# Altium PCB classyTKL_MXHS.PcbDoc (part 2 of 2)
Units mm, origin at the board's own origin, x right, y up, seen from the top; angles counter-clockwise.
Board outline 346.59 x 122.85 mm, 2 copper layers (Component Side, Bottom Layer), stack 1.571 mm thick; 194 components, 125 nets, 948 pads, 130 vias.
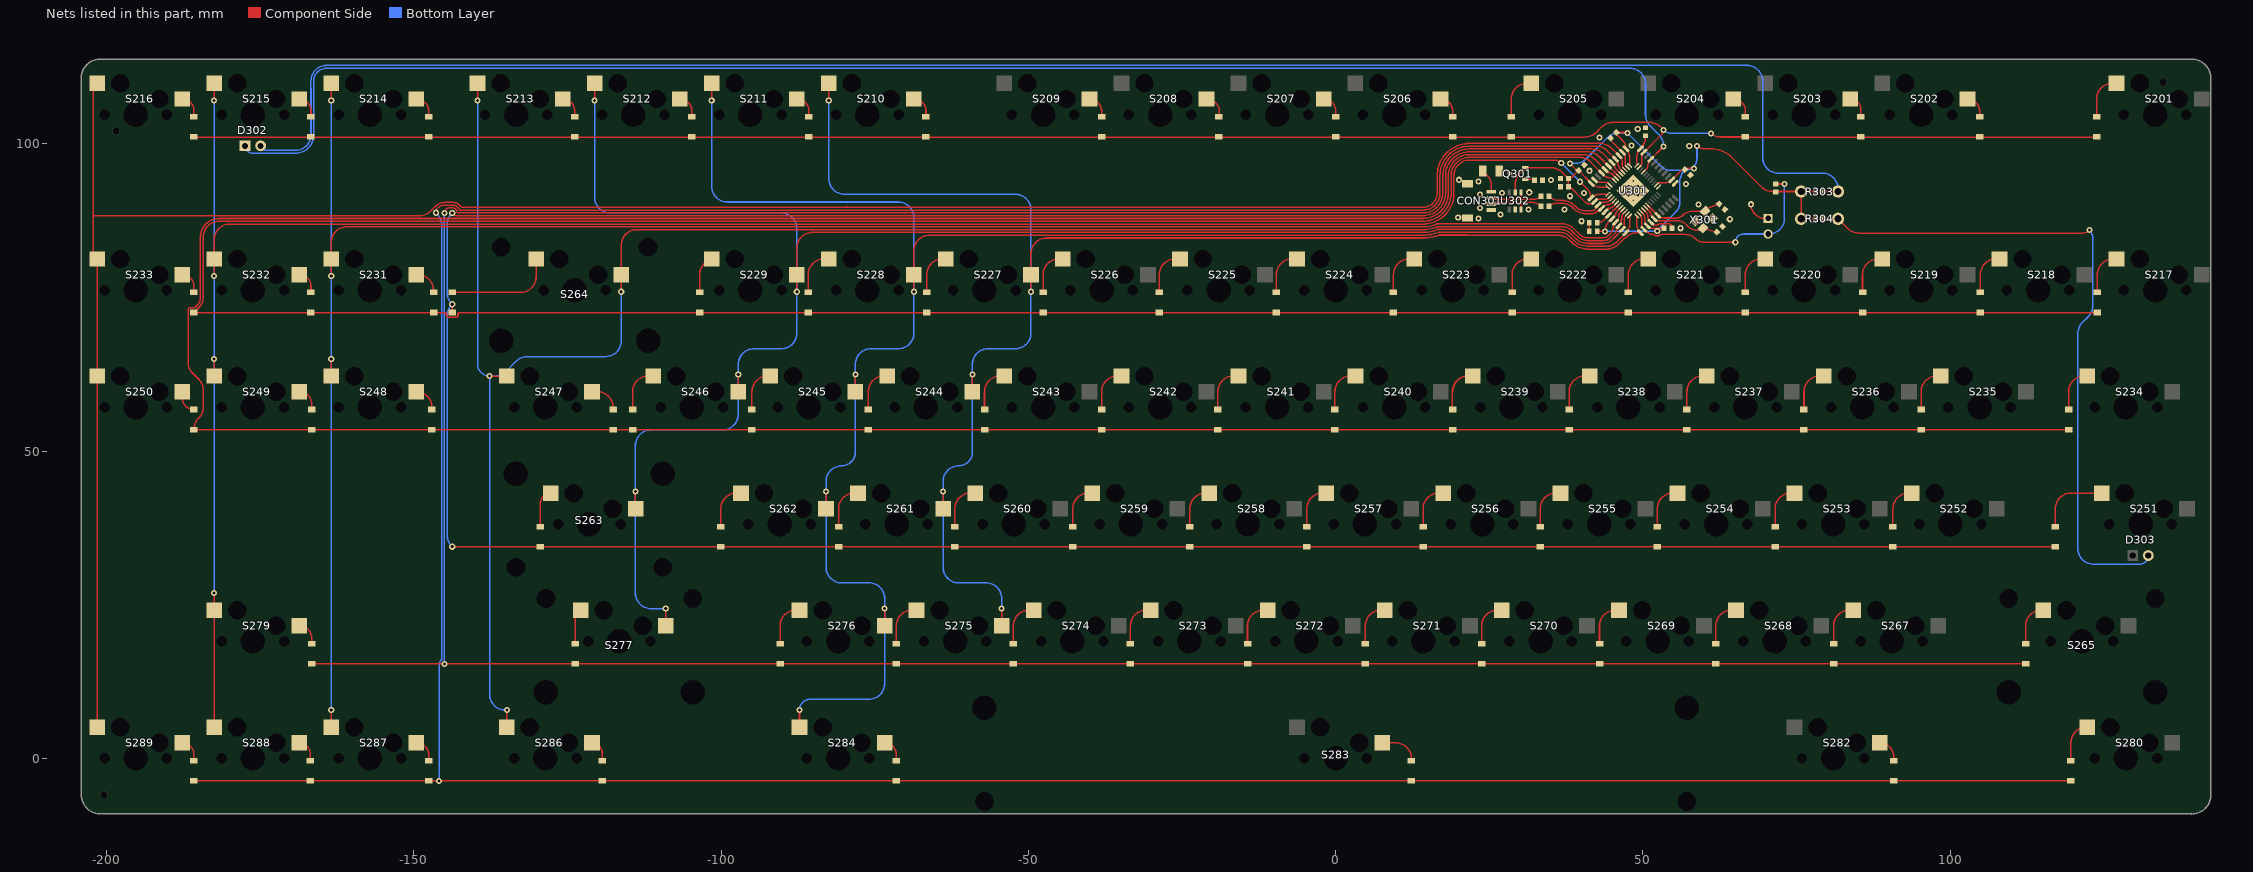
[diagram p2: the nets of this part, all layers, seen from the top]

## Via types
v1: diameter 1, hole 0.5, Component Side to Bottom Layer, tented both sides, 121 vias
v2: diameter 0.6, hole 0.3, Component Side to Bottom Layer, tented bottom, 9 vias

## Nets (pads, with @x,y where several pads share a name; then routed paths per layer and width w, separated by ;. In a path a pad name is that pad's centre, name@x,y a point inside that pad or via, vN(x,y) a via of type N, cw(c..) or ccw(c..) an arc to the next point about the centre after c; other vN are vias at no path point) (continued)
col11: S210.2 S227.2 S244.2 S261.2 S275.2 U301.12 | length 253.3
  Component Side w0.254: v1(-82.49,107.061) S210.2@-82.491,109.855 ; S261.2@-63.878,40.64 v1(-63.878,43.434) ; S244.2@-59.116,59.69 v1(-59.116,62.484) ; S275.2@-54.353,21.59 v1(-54.353,24.384) ; v1(-49.59,75.946) S227.2@-49.591,78.74 -49.591,82.153 cw(c-47.051,82.153) -47.051,84.693 14.198,84.693 ccw(c14.198,92.004) 16.777,85.163 cw(c16.866,84.925) 16.867,85.179 21.325,85.179 cw(c21.326,84.925) 21.333,85.179 ccw(c21.386,87.045) 21.386,85.178 36.032,85.178 cw(c36.034,84.47) 36.036,85.178 cw(c36.034,84.47) 36.056,85.178 cw(c35.972,82.185) 37.941,84.44 cw(c37.641,84.099) 37.962,84.421 ; 37.963,84.419 38.013,84.369 38.014,84.368 ; 38.015,84.367 38.395,83.987 ccw(c39.358,84.951) 38.486,83.904 cw(c38.323,83.709) 38.493,83.898 ccw(c41.127,86.847) 40.45,82.951 ccw(c41.127,86.847) 41.127,82.893 44.159,82.893 ccw(c44.159,85.433) 45.955,83.637 46.374,84.055 46.619,84.301 46.939,84.621 cw(c47.119,84.441) 47.06,84.689 ccw(c46.926,85.25) 47.172,84.728 ccw(c46.926,85.25) 47.333,84.841 47.464,84.972 47.595,85.103 cw(c47.775,84.924) 47.636,85.137 cw(c49.026,83.01) 49.026,85.55 U301.12@49.595,85.55 cw(c51.046,87.001) 48.994,87.001 U301.12@48.994,88.273
  Bottom Layer w0.254: v1(-82.49,107.061) -82.49,94.361 ccw(c-79.95,94.361) -79.95,91.821 -52.13,91.821 cw(c-52.13,89.281) -49.59,89.281 v1(-49.59,75.946) -49.59,69.215 cw(c-52.13,69.215) -52.13,66.675 -56.576,66.675 ccw(c-56.576,64.135) -59.116,64.135 v1(-59.116,62.484) -59.116,49.847 cw(c-61.338,49.847) -61.338,47.625 ccw(c-61.338,45.085) -63.878,45.085 v1(-63.878,43.434) -63.878,31.115 ccw(c-61.338,31.115) -61.338,28.575 -56.893,28.575 cw(c-56.893,26.035) -54.353,26.035 v1(-54.353,24.384)
col12: S211.2 S228.2 S245.2 S262.2 S276.2 S284.2 U301.11 | length 301.7
  Component Side w0.254: v1(-101.54,107.061) S211.2@-101.541,109.855 ; S284.2@-87.253,5.08 v1(-87.253,7.874) ; S262.2@-82.928,40.64 v1(-82.928,43.434) ; S245.2@-78.166,59.69 v1(-78.166,62.484) ; S276.2@-73.403,21.59 v1(-73.403,24.384) ; v1(-68.64,75.946) S228.2@-68.641,78.74 -68.641,82.607 cw(c-66.101,82.607) -66.101,85.147 14.198,85.147 ccw(c14.198,92.004) 16.69,85.616 cw(c16.782,85.379) 16.783,85.633 33.552,85.633 cw(c33.554,85.379) 33.562,85.633 ccw(c33.603,86.816) 33.603,85.632 36.34,85.632 cw(c36.34,83.092) 38.136,84.888 38.335,84.69 38.716,84.309 ccw(c39.358,84.951) 38.785,84.246 ccw(c41.127,86.847) 41.127,83.347 43.971,83.347 ccw(c43.971,85.887) 45.767,84.091 U301.11@47.226,85.55 47.417,85.741 ccw(c46.426,86.732) 47.827,86.732 U301.11@47.827,88.273
  Bottom Layer w0.254: v1(-101.54,107.061) -101.54,93.091 ccw(c-99,93.091) -99,90.551 -71.18,90.551 cw(c-71.18,88.011) -68.64,88.011 v1(-68.64,75.946) -68.64,69.215 cw(c-71.18,69.215) -71.18,66.675 -75.626,66.675 ccw(c-75.626,64.135) -78.166,64.135 v1(-78.166,62.484) -78.166,49.847 cw(c-80.388,49.847) -80.388,47.625 ccw(c-80.388,45.085) -82.928,45.085 v1(-82.928,43.434) -82.928,31.115 ccw(c-80.388,31.115) -80.388,28.575 -75.943,28.575 cw(c-75.943,26.035) -73.403,26.035 v1(-73.403,24.384) -73.403,12.192 cw(c-75.943,12.192) -75.943,9.652 -85.475,9.652 ccw(c-85.475,7.874) v1(-87.253,7.874)
col13: S212.2 S229.2 S246.2 S263.2 S277.2 U301.10 | length 297.6
  Component Side w0.254: v1(-120.59,107.061) S212.2@-120.591,109.855 ; S263.2@-113.951,40.64 v1(-113.951,43.434) ; S277.2@-109.021,21.59 v1(-109.021,24.384) ; S246.2@-97.216,59.69 v1(-97.216,62.484) ; v1(-87.69,75.946) S229.2@-87.691,78.74 -87.691,83.061 cw(c-85.151,83.061) -85.151,85.601 14.198,85.601 ccw(c14.198,92.004) 16.6,86.068 cw(c16.695,85.833) 16.697,86.087 36.528,86.087 cw(c36.528,83.547) 38.281,85.386 cw(c38.105,85.202) 38.284,85.383 cw(c38.105,85.202) 38.285,85.381 39.037,84.63 ccw(c39.358,84.951) 39.074,84.597 cw(c38.915,84.398) 39.085,84.587 ccw(c41.127,86.847) 41.127,83.801 43.378,83.801 ccw(c43.378,86.254) 45.112,84.518 ccw(c43.378,86.254) 45.113,84.52 45.257,84.664 46.661,86.067 ccw(c45.908,86.82) 46.827,86.282 ccw(c45.908,86.82) 46.972,86.82 46.972,87.686 cw(c48.032,87.686) 47.283,88.435 U301.10@47.474,88.626
  Bottom Layer w0.254: v1(-120.59,107.061) -120.59,91.313 ccw(c-118.05,91.313) -118.05,88.773 -90.23,88.773 cw(c-90.23,86.233) -87.69,86.233 v1(-87.69,75.946) -87.69,69.215 cw(c-90.23,69.215) -90.23,66.675 -94.676,66.675 ccw(c-94.676,64.135) -97.216,64.135 v1(-97.216,62.484) -97.216,56.007 cw(c-99.756,56.007) -99.756,53.467 -111.411,53.467 ccw(c-111.411,50.927) -113.951,50.927 v1(-113.951,43.434) -113.951,26.924 ccw(c-111.411,26.924) -111.411,24.384 v1(-109.021,24.384)
col14: S213.2 S247.2 S264.2 S286.2 U301.9 | length 318.3
  Component Side w0.254: v1(-139.64,107.061) S213.2@-139.641,109.855 ; v1(-137.672,62.23) S247.2@-134.878,62.23 ; S286.2@-134.878,5.08 v1(-134.878,7.874) ; v1(-116.265,75.946) S264.2@-116.266,78.74 -116.266,83.515 cw(c-113.726,83.515) -113.726,86.055 14.198,86.055 ccw(c14.198,92.004) 16.507,86.521 cw(c16.605,86.287) 16.607,86.541 36.715,86.541 cw(c36.715,84.001) 38.511,85.797 39.358,84.951 cw(c39.207,84.746) 39.379,84.934 ccw(c41.127,86.847) 41.127,84.255 43.378,84.255 ccw(c43.378,86.254) 44.792,84.841 45.449,85.497 ccw(c44.53,86.416) 45.829,86.416 U301.9@46.095,86.682 ccw(c45.101,87.675) 46.506,87.675 46.506,87.94 cw(c47.535,87.94) 46.808,88.667 U301.9@47.12,88.98
  Bottom Layer w0.254: v1(-139.64,107.061) -139.64,64.198 ccw(c-137.672,64.198) v1(-137.672,62.23) ; v1(-134.878,7.874) -135.132,7.874 cw(c-135.132,10.414) -137.672,10.414 v1(-137.672,62.23) ; v1(-116.265,75.946) -116.265,67.945 cw(c-118.805,67.945) -118.805,65.405 -131.536,65.405 ccw(c-131.536,62.865) -133.332,64.661 -135.019,62.974 cw(c-136.815,64.77) -136.815,62.23 v1(-137.672,62.23)
col15: S214.2 S231.2 S248.2 S287.2 U301.8 | length 328.3
  Component Side w0.254: S287.2@-163.453,5.08 v1(-163.453,7.874) ; S248.2@-163.453,62.23 v1(-163.453,65.024) ; v1(-163.452,78.486) S231.2@-163.453,81.28 -163.453,83.969 cw(c-160.913,83.969) -160.913,86.509 14.198,86.509 ccw(c14.198,92.004) 16.333,86.94 ccw(c14.198,92.004) 16.41,86.974 cw(c16.512,86.741) 16.513,86.995 36.903,86.995 cw(c36.903,84.455) 38.7,86.251 39.615,85.335 ccw(c41.127,86.847) 39.616,85.334 ccw(c41.127,86.847) 41.127,84.709 43.367,84.709 ccw(c43.367,86.282) 44.479,85.17 ccw(c42.725,86.924) 44.582,85.279 ccw(c42.725,86.924) 45.206,86.924 U301.8@45.529,87.247 45.714,87.432 ccw(c44.896,88.25) 46.052,88.25 46.052,88.321 cw(c46.772,88.321) 46.263,88.83 U301.8@46.767,89.333 ; v1(-163.452,107.061) S214.2@-163.453,109.855
  Bottom Layer w0.254: v1(-163.453,7.874) v1(-163.452,78.486) v1(-163.452,107.061)
col16: S215.2 S232.2 S249.2 S279.2 S288.2 U301.1 | length 351.9
  Component Side w0.254: S288.2@-182.503,5.08 S279.2@-182.503,24.13 v1(-182.503,26.924) ; S249.2@-182.503,62.23 v1(-182.503,65.024) ; S232.2@-182.503,81.28 -182.503,84.423 cw(c-179.963,84.423) -179.963,86.963 14.198,86.963 ccw(c14.198,92.004) 19.239,92.004 19.239,94.828 cw(c21.779,94.828) 21.779,97.368 35.576,97.368 cw(c35.576,95.774) v1(36.703,96.901) ; v1(-182.503,78.486) S232.2@-182.503,81.28 ; v1(-182.503,107.061) S215.2@-182.503,109.855 ; v1(39.751,93.853) 40.984,92.62 cw(c39.572,91.207) U301.1@41.569,91.207 cw(c43.02,89.756) 43.02,91.808 U301.1@44.292,91.808
  Bottom Layer w0.254: v1(-182.503,26.924) v1(-182.503,65.024) v1(-182.503,107.061) ; v1(36.703,96.901) v1(39.751,93.853)
col17: S216.2 S233.2 S250.2 S289.2 U301.36 | length 365.4
  Component Side w0.254: S289.2@-201.553,5.08 S250.2@-201.553,62.23 S233.2@-201.553,81.28 cw(c-201.553,81.911) -202.184,81.911 -202.184,88.265 ; S216.2@-201.553,109.855 ccw(c-201.553,109.224) -202.184,109.224 -202.184,88.265 ; U301.36@47.12,95.803 46.803,96.12 cw(c47.259,96.576) 46.614,96.576 46.614,97.223 ccw(c45.747,97.223) 46.361,97.835 U301.36@46.095,98.101 44.848,99.348 ccw(c43.052,97.552) 43.052,100.092 21.779,100.092 ccw(c21.779,94.828) 16.515,94.828 16.515,92.004 cw(c14.198,92.004) 14.198,89.687 -79.256,89.687 cw(c-79.256,90.035) -79.502,89.789 cw(c-80.422,90.709) -79.539,89.754 cw(c-79.71,89.941) -79.71,89.687 -142.24,89.687 cw(c-142.132,89.917) -142.34,89.771 ccw(c-143.759,88.773) -143.764,90.508 -144.787,90.508 ccw(c-144.787,87.968) -146.583,89.764 -146.71,89.637 -146.833,89.514 cw(c-147.012,89.694) -146.869,89.484 ccw(c-146.403,88.801) -147.087,89.267 cw(c-147.296,89.41) -147.117,89.23 -147.278,89.069 cw(c-149.074,90.865) -148.274,88.454 cw(c-149.074,90.865) -149.074,88.325 -202.124,88.325 ccw(c-202.124,88.265) -202.184,88.265
D_N: CON301.2 R305.2 U302.4 | length 9.4
  Component Side w0.254: CON301.2@25.344,91.24 ccw(c25.999,91.895) 25.999,90.969 30.104,90.969 ; U302.4@30.165,92.109 30.165,91.03 cw(c30.104,91.03) 30.105,90.969 ; R305.2@33.392,91.496 cw(c32.118,92.769) 32.352,90.984 cw(c32.118,92.769) 32.118,90.969 30.104,90.969
D_P: CON301.3 R306.2 U302.3 | length 9.5
  Component Side w0.254: CON301.3@25.344,90.24 cw(c25.999,89.585) 25.999,90.511 30.099,90.511 ; U302.3@30.165,89.359 30.165,90.445 ccw(c30.099,90.445) 30.099,90.511 ; R306.2@33.392,89.845 ccw(c31.783,88.236) 32.246,90.464 ccw(c31.783,88.236) 31.783,90.511 30.099,90.511
D_PRE_N: R305.1 U301.3 | length 11.7
  Component Side w0.254: R305.1@34.692,91.496 ccw(c36.326,93.13) 36.326,90.819 36.788,90.819 ; 36.788,90.81 cw(c36.788,87.813) 38.907,89.932 38.994,89.845 ccw(c40.723,91.573) 40.723,89.129 41.685,89.129 ccw(c41.685,89.839) 42.186,89.336 42.542,89.692 ccw(c42.159,90.076) U301.3@42.701,90.076 cw(c43.786,88.991) 43.786,90.525 43.82,90.525 ccw(c43.82,91.979) 44.344,90.623 ccw(c43.82,91.979) 44.387,90.64 ccw(c43.82,91.979) 44.849,90.951 U301.3@44.999,91.101
D_PRE_P: R306.1 U301.4 | length 12
  Component Side w0.254: R306.1@34.692,89.845 cw(c35.918,88.619) 35.918,90.353 36.788,90.353 cw(c36.788,87.813) 38.584,89.609 38.671,89.522 ccw(c40.723,91.573) 40.723,88.672 41.896,88.672 ; 41.661,88.663 41.762,88.663 ccw(c41.762,89.664) 41.896,88.672 ; U301.4@45.212,90.607 45.044,90.439 cw(c44.208,91.275) 44.661,90.183 cw(c44.208,91.275) 44.496,90.128 cw(c44.208,91.275) 44.208,90.093 ccw(c44.208,89.226) 43.595,89.839 U301.4@43.266,89.51 ccw(c43.266,88.925) 42.853,89.339 42.47,88.956 cw(c41.762,89.664) 41.896,88.672
GND: C301.1 C302.1 C303.1 C304.1 C305.1 C306.1 C307.1 C308.1 C309.1 C310.1 CON301.4 CON301.5 CON302.1 R302.2 R307.2 U301.5 U301.15 U301.23 U301.35 U301.43 U302.2 X301.2 X301.4 | length 26.1
  Component Side w0.254: C302.1@41.265,85.781 C301.1@41.265,87.178 ; U301.43@42.135,94.142 ccw(c43.003,95.01) 43.003,93.782 43.693,93.782 cw(c43.693,92.579) U301.43@44.544,93.43 ; U301.5@43.832,88.944 44.307,89.419 cw(c44.669,89.057) 44.669,89.569 ccw(c44.669,90.081) 45.031,89.719 U301.5@45.706,90.394 ; U301.43@44.544,93.43 U301.43@44.645,93.328 ; C306.1@44.758,100.942 ccw(c45.657,100.942) 45.021,100.306 U301.35@46.661,98.667 46.847,98.481 cw(c46.253,97.888) 47.092,97.888 47.092,96.538 U301.35@47.474,96.157 ; v2(46.855,92.392) v2(48.411,92.392) U301.43@48.411,90.977 ; v1(48.138,99.751) v1@48.392,99.751 ; U301.15@50.055,89.333 50.505,88.882 cw(c49.781,88.158) 50.805,88.158 ccw(c51.83,88.158) 51.105,87.434 U301.15@51.292,87.247 51.597,86.943 ccw(c51.948,87.295) 51.948,86.797 52.249,86.797 ccw(c52.249,87.27) 52.583,86.935 cw(c52.838,86.681) 52.838,87.041 54.026,87.041 cw(c54.026,86.208) 54.615,86.797 cw(c54.303,86.484) 54.745,86.484 C303.1@54.745,86.289 ; v1(67.581,90.178) ccw(c69.875,90.178) 67.656,89.596 ccw(c69.875,90.178) 67.656,89.595 ccw(c69.875,90.178) 69.875,87.884 CON302.1@70.116,87.884
  other v1: 56.139,86.289 40.01,87.432 64.135,87.757 23.241,87.884 19.939,88.011 26.797,88.519 31.374,89.337 37.216,89.337 23.5,89.591 59.055,90.17 38.105,91.496 23.5,91.75 27.056,92.004 40.391,92.004 31.501,92.131 57.023,93.472 23.246,93.909 35.052,94.107 20.071,94.163 41.275,95.631 57.531,99.695 42.931,101.021 49.154,102.418
  other v2: 48.411,90.836 47.633,91.614 49.188,91.614 49.966,92.392 47.633,93.169 49.188,93.169 48.411,93.947
NetC301_2: C301.2 U301.6 | length 4.6
  Component Side w0.254: C301.2@42.565,87.178 ccw(c42.565,88.703) 43.643,87.624 ; 43.644,87.625 U301.6@44.398,88.379 44.398,88.39 46.048,90.04 U301.6@46.06,90.04
NetC307_2: C307.2 U301.17 X301.3 | length 13.2
  Component Side w0.254: U301.17@50.762,90.04 U301.17@52.423,88.379 ccw(c53.461,89.416) 53.461,87.949 54.369,87.949 54.378,87.94 55.377,87.94 ccw(c55.377,89.473) 56.462,88.389 ; 56.462,88.389 cw(c58.008,86.843) 58.008,89.029 60.041,89.029 ccw(c60.041,89.15) X301.3@60.126,89.065 cw(c60.596,89.065) 60.596,89.535 C307.2@62.405,90.249
NetC308_2: C308.2 U301.16 X301.1 | length 13.3
  Component Side w0.254: U301.16@50.408,89.687 51.109,88.986 cw(c50.747,88.623) 51.259,88.623 ccw(c51.772,88.623) 51.409,88.262 U301.16@51.858,87.813 ; U301.16@51.858,87.813 ccw(c52.626,88.581) 52.626,87.495 54.181,87.495 54.19,87.486 55.787,87.486 cw(c55.787,85.98) 56.851,87.046 ; 56.851,87.045 57.293,86.604 ccw(c58.801,88.112) 58.801,85.979 58.981,85.979 ccw(c58.981,87.099) X301.1@59.773,86.307 C308.2@62.024,85.646
NetD201_1: D201.1 S201.1 | length 6.9
  Component Side w0.254: D201.1@123.83,104.41 123.83,107.315 cw(c126.37,107.315) S201.1@126.37,109.855
NetD202_1: D202.1 S202.1 | length 4
  Component Side w0.254: S202.1@102.809,107.315 cw(c102.809,105.344) 104.78,105.344 D202.1@104.78,104.41
NetD203_1: D203.1 S203.1 | length 3.9
  Component Side w0.254: S203.1@83.759,107.315 cw(c83.759,105.598) 85.476,105.598 D203.1@85.476,104.41
NetD204_1: D204.1 S204.1 | length 4
  Component Side w0.254: S204.1@64.709,107.315 cw(c64.709,105.344) 66.68,105.344 D204.1@66.68,104.41
NetD205_1: D205.1 S205.1 | length 6.9
  Component Side w0.254: D205.1@28.58,104.41 28.58,107.315 cw(c31.12,107.315) S205.1@31.12,109.855
NetD206_1: D206.1 S206.1 | length 4
  Component Side w0.254: S206.1@17.054,107.315 cw(c17.054,105.314) 19.055,105.314 D206.1@19.055,104.41
NetD207_1: D207.1 S207.1 | length 4
  Component Side w0.254: S207.1@-1.966,107.315 cw(c-1.966,105.344) 0.005,105.344 D207.1@0.005,104.41
NetD208_1: D208.1 S208.1 | length 4.2
  Component Side w0.254: S208.1@-21.016,107.315 cw(c-21.016,105.222) -18.923,105.222 -18.923,104.532 cw(c-19.045,104.532) D208.1@-19.045,104.41
NetD209_1: D209.1 S209.1 | length 4
  Component Side w0.254: S209.1@-40.066,107.315 cw(c-40.066,105.344) -38.095,105.344 D209.1@-38.095,104.41
NetD210_1: D210.1 S210.1 | length 4
  Component Side w0.254: S210.1@-68.641,107.315 cw(c-68.641,105.344) -66.67,105.344 D210.1@-66.67,104.41
NetD211_1: D211.1 S211.1 | length 4
  Component Side w0.254: S211.1@-87.691,107.315 cw(c-87.691,105.344) -85.72,105.344 D211.1@-85.72,104.41
NetD212_1: D212.1 S212.1 | length 4
  Component Side w0.254: S212.1@-106.741,107.315 cw(c-106.741,105.344) -104.77,105.344 D212.1@-104.77,104.41
NetD213_1: D213.1 S213.1 | length 4
  Component Side w0.254: S213.1@-125.791,107.315 cw(c-125.791,105.344) -123.82,105.344 D213.1@-123.82,104.41
NetD214_1: D214.1 S214.1 | length 4.1
  Component Side w0.254: S214.1@-149.602,107.315 cw(c-149.602,105.281) -147.569,105.281 D214.1@-147.569,104.41
NetD215_1: D215.1 S215.1 | length 4
  Component Side w0.254: S215.1@-168.653,107.315 cw(c-168.653,105.408) -166.746,105.408 D215.1@-166.746,104.41
NetD216_1: D216.1 S216.1 | length 4
  Component Side w0.254: S216.1@-187.703,107.315 cw(c-187.703,105.408) -185.796,105.408 D216.1@-185.796,104.41
NetD217_1: D217.1 S217.1 | length 6.9
  Component Side w0.254: D217.1@123.957,75.835 123.957,78.74 cw(c126.497,78.74) S217.1@126.497,81.28
NetD218_1: D218.1 S218.1 | length 6.9
  Component Side w0.254: D218.1@104.907,75.835 104.907,78.74 cw(c107.447,78.74) S218.1@107.447,81.28
NetD219_1: D219.1 S219.1 | length 6.9
  Component Side w0.254: D219.1@85.73,75.835 85.73,78.74 cw(c88.27,78.74) S219.1@88.27,81.28
NetD220_1: D220.1 S220.1 | length 7.6
  Component Side w0.254: D220.1@66.675,75.835 66.675,78.74 cw(c69.215,78.74) 69.215,81.28 S220.1@69.909,81.28
NetD221_1: D221.1 S221.1 | length 7.6
  Component Side w0.254: D221.1@47.63,75.835 47.63,78.74 cw(c50.17,78.74) 50.17,81.28 S221.1@50.859,81.28
NetD222_1: D222.1 S222.1 | length 6.9
  Component Side w0.254: D222.1@28.707,75.835 28.707,78.74 cw(c31.247,78.74) S222.1@31.247,81.28
NetD223_1: D223.1 S223.1 | length 6.9
  Component Side w0.254: D223.1@9.403,75.835 9.403,78.74 cw(c11.943,78.74) S223.1@11.943,81.28
NetD224_1: D224.1 S224.1 | length 6.9
  Component Side w0.254: D224.1@-9.647,75.835 -9.647,78.74 cw(c-7.107,78.74) S224.1@-7.107,81.28
NetD225_1: D225.1 S225.1 | length 6.9
  Component Side w0.254: D225.1@-28.697,75.835 -28.697,78.74 cw(c-26.157,78.74) S225.1@-26.157,81.28
NetD226_1: D226.1 S226.1 | length 6.9
  Component Side w0.254: D226.1@-47.62,75.835 -47.62,78.74 cw(c-45.08,78.74) S226.1@-45.08,81.28
NetD227_1: D227.1 S227.1 | length 6.9
  Component Side w0.254: D227.1@-66.543,75.835 -66.543,78.74 cw(c-64.003,78.74) S227.1@-64.003,81.28
NetD228_1: D228.1 S228.1 | length 6.9
  Component Side w0.254: D228.1@-85.847,75.835 -85.847,78.74 cw(c-83.307,78.74) S228.1@-83.307,81.28
NetD229_1: D229.1 S229.1 | length 6.9
  Component Side w0.254: D229.1@-103.5,75.835 -103.5,78.74 cw(c-100.96,78.74) S229.1@-100.96,81.28
NetD231_1: D231.1 S231.1 | length 4.6
  Component Side w0.254: S231.1@-149.602,78.74 -149.347,78.74 cw(c-149.347,76.2) -146.807,76.2 D231.1@-146.807,75.835
NetD232_1: D232.1 S232.1 | length 4
  Component Side w0.254: S232.1@-168.653,78.74 cw(c-168.653,76.833) -166.746,76.833 D232.1@-166.746,75.835
NetD233_1: D233.1 S233.1 | length 4
  Component Side w0.254: S233.1@-187.703,78.74 cw(c-187.703,76.833) -185.796,76.833 D233.1@-185.796,75.835
NetD234_1: D234.1 S234.1 | length 6.9
  Component Side w0.254: D234.1@119.258,56.785 119.258,59.69 cw(c121.798,59.69) S234.1@121.798,62.23
NetD235_1: D235.1 S235.1 | length 6.9
  Component Side w0.254: D235.1@95.255,56.785 95.255,59.69 cw(c97.795,59.69) S235.1@97.795,62.23
NetD236_1: D236.1 S236.1 | length 6.9
  Component Side w0.254: D236.1@76.205,56.785 76.205,59.69 cw(c78.745,59.69) S236.1@78.745,62.23
NetD237_1: D237.1 S237.1 | length 6.9
  Component Side w0.254: D237.1@57.155,56.785 57.155,59.69 cw(c59.695,59.69) S237.1@59.695,62.23
NetD238_1: D238.1 S238.1 | length 6.9
  Component Side w0.254: D238.1@37.978,56.785 37.978,59.69 cw(c40.518,59.69) S238.1@40.518,62.23
NetD239_1: D239.1 S239.1 | length 10.9
  Component Side w0.254: D239.1@18.992,56.785 18.992,59.69 cw(c21.532,59.69) S239.1@21.532,62.23 ; 19.055,59.69 cw(c21.595,59.69) S239.1@21.595,62.23
NetD240_1: D240.1 S240.1 | length 6.9
  Component Side w0.254: D240.1@-0.122,56.785 -0.122,59.69 cw(c2.418,59.69) S240.1@2.418,62.23
NetD241_1: D241.1 S241.1 | length 6.9
  Component Side w0.254: D241.1@-19.172,56.785 -19.172,59.69 cw(c-16.632,59.69) S241.1@-16.632,62.23
NetD242_1: D242.1 S242.1 | length 6.9
  Component Side w0.254: D242.1@-38.095,56.785 -38.095,59.69 cw(c-35.555,59.69) S242.1@-35.555,62.23
NetD243_1: D243.1 S243.1 | length 6.9
  Component Side w0.254: D243.1@-57.145,56.785 -57.145,59.69 cw(c-54.605,59.69) S243.1@-54.605,62.23
NetD244_1: D244.1 S244.1 | length 6.9
  Component Side w0.254: D244.1@-76.068,56.785 -76.068,59.69 cw(c-73.528,59.69) S244.1@-73.528,62.23
NetD245_1: D245.1 S245.1 | length 7.3
  Component Side w0.254: D245.1@-94.991,56.785 -94.991,59.69 cw(c-92.451,59.69) -92.451,62.23 S245.1@-92.016,62.23
NetD246_1: D246.1 S246.1 | length 7.7
  Component Side w0.254: D246.1@-114.422,56.785 -114.422,59.69 cw(c-111.882,59.69) -111.882,62.23 S246.1@-111.066,62.23
NetD247_1: D247.1 S247.1 | length 5.2
  Component Side w0.254: S247.1@-121.028,59.69 -120.137,59.69 cw(c-120.137,57.15) -117.597,57.15 D247.1@-117.597,56.785
NetD248_1: D248.1 S248.1 | length 4.4
  Component Side w0.254: S248.1@-149.602,59.69 -149.601,59.69 cw(c-149.601,57.15) -147.061,57.15 D248.1@-147.061,56.785
NetD249_1: D249.1 S249.1 | length 4.1
  Component Side w0.254: S249.1@-168.653,59.69 cw(c-168.653,57.656) -166.619,57.656 D249.1@-166.619,56.785
NetD250_1: D250.1 S250.1 | length 4
  Component Side w0.254: S250.1@-187.703,59.69 -187.703,58.692 ccw(c-185.796,58.692) D250.1@-185.796,56.785
NetD251_1: D251.1 S251.1 | length 11.2
  Component Side w0.254: D251.1@117.099,37.735 117.099,40.64 ; 117.099,40.952 117.099,40.64 ; S251.1@123.666,43.18 119.639,43.18 ccw(c119.639,40.64) 117.099,40.64
NetD252_1: D252.1 S252.1 | length 7.4
  Component Side w0.254: D252.1@90.683,37.735 90.683,40.64 cw(c93.223,40.64) 93.223,43.18 S252.1@93.722,43.18
NetD253_1: D253.1 S253.1 | length 7.5
  Component Side w0.254: D253.1@71.506,37.735 71.506,40.64 cw(c74.046,40.64) 74.046,43.18 S253.1@74.672,43.18
NetD254_1: D254.1 S254.1 | length 7.6
  Component Side w0.254: D254.1@52.329,37.735 52.329,40.64 cw(c54.869,40.64) 54.869,43.18 S254.1@55.622,43.18
NetD255_1: D255.1 S255.1 | length 7.6
  Component Side w0.254: D255.1@33.279,37.735 33.279,40.64 cw(c35.819,40.64) 35.819,43.18 S255.1@36.572,43.18
NetD256_1: D256.1 S256.1 | length 7.6
  Component Side w0.254: D256.1@14.229,37.735 14.229,40.64 cw(c16.769,40.64) 16.769,43.18 S256.1@17.522,43.18
NetD257_1: D257.1 S257.1 | length 7.5
  Component Side w0.254: D257.1@-4.694,37.735 -4.694,40.64 cw(c-2.154,40.64) -2.154,43.18 S257.1@-1.528,43.18
NetD258_1: D258.1 S258.1 | length 7.5
  Component Side w0.254: D258.1@-23.744,37.735 -23.744,40.64 cw(c-21.204,40.64) -21.204,43.18 S258.1@-20.578,43.18
NetD259_1: D259.1 S259.1 | length 7.5
  Component Side w0.254: D259.1@-42.794,37.735 -42.794,40.64 cw(c-40.254,40.64) -40.254,43.18 S259.1@-39.628,43.18
NetD260_1: D260.1 S260.1 | length 7.6
  Component Side w0.254: D260.1@-61.971,37.735 -61.971,40.64 cw(c-59.431,40.64) -59.431,43.18 S260.1@-58.678,43.18
NetD261_1: D261.1 S261.1 | length 7.5
  Component Side w0.254: D261.1@-80.894,37.735 -80.894,40.64 cw(c-78.354,40.64) -78.354,43.18 S261.1@-77.728,43.18
NetD262_1: D262.1 S262.1 | length 7.6
  Component Side w0.254: D262.1@-100.071,37.735 -100.071,40.64 cw(c-97.531,40.64) -97.531,43.18 S262.1@-96.778,43.18
NetD263_1: D263.1 S263.1 | length 6.4
  Component Side w0.254: D263.1@-129.413,37.735 -129.413,41.508 cw(c-127.741,41.508) S263.1@-127.741,43.18
NetD264_1: D264.1 S264.1 | length 18
  Component Side w0.254: D264.1@-143.759,75.835 -132.656,75.835 ccw(c-132.656,78.375) -130.116,78.375 S264.1@-130.116,81.28
NetD265_1: D265.1 S265.1 | length 7.2
  Component Side w0.254: D265.1@112.268,18.685 112.268,21.59 cw(c114.808,21.59) 114.808,24.13 S265.1@115.153,24.13
NetD267_1: D267.1 S267.1 | length 7.5
  Component Side w0.254: D267.1@81.031,18.685 81.031,21.59 cw(c83.571,21.59) 83.571,24.13 S267.1@84.197,24.13
NetD268_1: D268.1 S268.1 | length 7.6
  Component Side w0.254: D268.1@61.854,18.685 61.854,21.59 cw(c64.394,21.59) 64.394,24.13 S268.1@65.147,24.13
NetD269_1: D269.1 S269.1 | length 7.5
  Component Side w0.254: D269.1@42.931,18.685 42.931,21.59 cw(c45.471,21.59) 45.471,24.13 S269.1@46.097,24.13
NetD270_1: D270.1 S270.1 | length 7.6
  Component Side w0.254: D270.1@23.754,18.685 23.754,21.59 cw(c26.294,21.59) 26.294,24.13 S270.1@27.047,24.13
NetD271_1: D271.1 S271.1 | length 7.5
  Component Side w0.254: D271.1@4.831,18.685 4.831,21.59 cw(c7.371,21.59) 7.371,24.13 S271.1@7.997,24.13
NetD272_1: D272.1 S272.1 | length 7.6
  Component Side w0.254: D272.1@-14.346,18.685 -14.346,21.59 cw(c-11.806,21.59) -11.806,24.13 S272.1@-11.053,24.13
NetD273_1: D273.1 S273.1 | length 7.6
  Component Side w0.254: D273.1@-33.396,18.685 -33.396,21.59 cw(c-30.856,21.59) -30.856,24.13 S273.1@-30.103,24.13
NetD274_1: D274.1 S274.1 | length 7.6
  Component Side w0.254: D274.1@-52.446,18.685 -52.446,21.59 cw(c-49.906,21.59) -49.906,24.13 S274.1@-49.153,24.13
NetD275_1: D275.1 S275.1 | length 7.6
  Component Side w0.254: D275.1@-71.496,18.685 -71.496,21.59 cw(c-68.956,21.59) -68.956,24.13 S275.1@-68.203,24.13
NetD276_1: D276.1 S276.1 | length 7.5
  Component Side w0.254: D276.1@-90.419,18.685 -90.419,21.59 cw(c-87.879,21.59) -87.879,24.13 S276.1@-87.253,24.13
NetD277_1: D277.1 S277.1 | length 5.9
  Component Side w0.254: D277.1@-123.75,18.685 -123.75,23.251 cw(c-122.871,23.251) S277.1@-122.871,24.13
NetD279_1: D279.1 S279.1 | length 4.1
  Component Side w0.254: S279.1@-168.653,21.59 cw(c-168.653,19.556) -166.619,19.556 D279.1@-166.619,18.685
NetD280_1: D280.1 S280.1 | length 7
  Component Side w0.254: D280.1@119.639,-0.365 119.639,2.54 cw(c122.179,2.54) 122.179,5.08 S280.1@122.297,5.08
NetD282_1: D282.1 S282.1 | length 4.2
  Component Side w0.254: S282.1@88.523,2.54 cw(c88.523,0.252) 90.81,0.252 D282.1@90.81,-0.365
NetD283_1: D283.1 S283.2 | length 6.6
  Component Side w0.254: S283.2@7.56,2.54 9.784,2.54 cw(c9.784,0) 12.324,0 D283.1@12.324,-0.365
NetD284_1: D284.1 S284.1 | length 4
  Component Side w0.254: S284.1@-73.402,2.54 cw(c-73.402,0.633) -71.496,0.633 D284.1@-71.496,-0.365
NetD286_1: D286.1 S286.1 | length 3.8
  Component Side w0.254: S286.1@-121.027,2.54 cw(c-121.027,0.887) -119.375,0.887 D286.1@-119.375,-0.365
NetD287_1: D287.1 S287.1 | length 4.1
  Component Side w0.254: S287.1@-149.603,2.54 cw(c-149.603,0.506) -147.569,0.506 D287.1@-147.569,-0.365
NetD288_1: D288.1 S288.1 | length 3.9
  Component Side w0.254: S288.1@-168.653,2.54 cw(c-168.653,0.76) -166.873,0.76 D288.1@-166.873,-0.365
NetD289_1: D289.1 S289.1 | length 4
  Component Side w0.254: S289.1@-187.703,2.54 cw(c-187.703,0.633) -185.796,0.633 D289.1@-185.796,-0.365
NetD302_1: D302.1 R303.2 | length 288.1
  Component Side w0.254: R303.2@79.395,92.258 R303.2@81.745,92.258
  Bottom Layer w0.254: D302.1@-174.942,99.695 -174.195,98.947 -169.286,98.947 ccw(c-169.286,101.487) -166.746,101.487 -166.746,109.082 ; -166.751,109.093 -166.751,110.236 cw(c-164.211,110.236) -164.211,112.776 66.934,112.776 cw(c66.934,110.236) 69.474,110.236 69.474,105.581 ; 69.48,105.411 69.48,99.822 69.48,97.79 ccw(c72.02,97.79) 69.48,97.788 ccw(c72.02,97.79) 72.02,95.25 79.205,95.25 cw(c79.205,92.71) 81.745,92.71 R303.2@81.745,92.258
NetD303_1: D303.1 R304.2 | length 110.7
  Component Side w0.254: R304.2@79.395,87.813 R304.2@81.745,87.813 83.312,86.247 ccw(c85.108,88.043) 85.108,85.503 121.533,85.503 ccw(c121.533,87.128) v1(122.682,85.979)
  Bottom Layer w0.254: v1(122.682,85.979) cw(c121.456,84.753) 123.19,84.753 123.19,73.696 cw(c120.65,73.696) 122.446,71.9 121.521,70.975 ccw(c123.317,69.179) 120.777,69.179 120.777,34.163 ccw(c123.317,34.163) 123.317,31.623 130.841,31.623 ccw(c130.841,33.02) D303.1@132.238,33.02
NetF301_2: F301.2 Q301.3 | length 1.9
  Component Side w0.254: F301.2@26.623,95.631 27.347,95.631 cw(c27.347,94.088) Q301.3@28.439,95.179
NetQ301_1: Q301.1 R307.1 | length 1.6
  Component Side w0.254: Q301.1@30.839,94.229 32.075,94.229 cw(c32.075,93.812) R307.1@32.37,94.107
NetR302_1: R302.1 U301.33 | length 5.2
  Component Side w0.254: U301.33@48.994,96.51 48.994,97.782 cw(c51.046,97.782) U301.33@49.595,99.233 49.675,99.313 ccw(c47.879,101.109) 50.419,101.109 R302.1@50.419,101.331
PC7: D201.2 D202.2 D203.2 D204.2 D205.2 D206.2 D207.2 D208.2 D209.2 D210.2 D211.2 D212.2 D213.2 D214.2 D215.2 D216.2 U301.32 | length 322.5
  Component Side w0.254: D216.2@-185.796,101.125 40.586,101.125 ccw(c40.586,103.665) 42.382,101.869 43.275,102.761 cw(c45.071,100.965) 45.071,103.505 51.079,103.505 cw(c51.079,100.965) 52.875,102.761 v1(53.345,102.291) cw(c52.285,102.291) 53.035,101.541 U301.32@50.161,98.667 ; U301.32@49.348,96.157 49.626,96.435 ccw(c49.231,96.83) 49.789,96.83 49.789,97.956 cw(c50.563,97.956) 49.828,98.195 cw(c50.563,97.956) U301.32@50.016,98.502 ; v1(61.087,101.727) ccw(c62.504,103.144) 62.504,101.14 D204.2@66.68,101.14 ; 62.743,101.125 D201.2@123.83,101.125
  Bottom Layer w0.254: v1(53.345,102.291) ccw(c54.707,103.653) 54.707,101.727 v1(61.087,101.727)
PF0: D217.2 D218.2 D219.2 D220.2 D221.2 D222.2 D223.2 D224.2 D225.2 D226.2 D227.2 D228.2 D229.2 D231.2 D232.2 D233.2 U301.41 | length 563.3
  Component Side w0.254: D233.2@-185.796,72.55 D231.2@-146.807,72.55 ; D233.2@-185.796,72.565 -185.021,73.34 ccw(c-186.817,75.136) -184.277,75.136 -184.277,84.877 cw(c-181.737,84.877) -181.737,87.417 14.198,87.417 ccw(c14.198,92.004) 18.785,92.004 18.785,94.828 cw(c21.779,94.828) 21.779,97.822 39.665,97.822 cw(c39.665,95.282) 41.461,97.078 U301.41@43.266,95.273 43.76,94.78 ccw(c44.328,95.348) 44.328,94.544 cw(c44.328,93.3) U301.41@45.208,94.18 ; D231.2@-146.807,72.565 -144.95,72.565 cw(c-144.95,72.311) -144.696,72.311 -144.696,72.11 ccw(c-144.369,72.11) -144.369,71.783 -143.148,71.783 ccw(c-143.148,72.11) -142.949,71.851 ccw(c-143.148,72.11) -142.821,72.11 -142.821,72.311 cw(c-142.567,72.311) -142.567,72.565 D229.2@-103.5,72.565 ; D229.2@-103.5,72.55 D217.2@123.957,72.55 ; U301.41@45.208,94.18 U301.41@45.352,94.036
PF1: D234.2 D235.2 D236.2 D237.2 D238.2 D239.2 D240.2 D241.2 D242.2 D243.2 D244.2 D245.2 D246.2 D247.2 D248.2 D249.2 D250.2 U301.40 | length 579.9
  Component Side w0.254: D250.2@-186.055,53.5 -166.619,53.5 D248.2@-147.061,53.5 ; D250.2@-185.796,53.515 -185.796,53.563 cw(c-183.256,53.563) -185.052,55.359 -185.021,55.39 ccw(c-186.817,57.186) -184.277,57.186 -184.277,59.908 ccw(c-186.817,59.908) -185.021,61.704 -185.989,62.672 cw(c-184.193,64.468) -186.733,64.468 -186.733,73.02 cw(c-186.406,73.02) -186.406,73.347 -185.761,73.347 ccw(c-185.761,73.601) -185.581,73.422 -185.343,73.659 ccw(c-186.817,75.136) -184.731,75.136 -184.731,84.877 cw(c-181.737,84.877) -181.737,87.871 14.198,87.871 ccw(c14.198,92.004) 18.331,92.004 18.331,94.828 cw(c21.779,94.828) 21.779,98.276 40.343,98.276 cw(c40.343,95.736) 42.139,97.532 U301.40@43.832,95.839 44.365,95.306 cw(c44.365,94.282) 45.089,95.006 ; D248.2@-147.061,53.515 D247.2@-117.597,53.515 ; D247.2@-117.597,53.5 D234.2@119.258,53.5 ; 45.089,95.006 U301.40@45.706,94.389
PF4: D251.2 D252.2 D253.2 D254.2 D255.2 D256.2 D257.2 D258.2 D259.2 D260.2 D261.2 D262.2 D263.2 D264.2 U301.39 | length 517.1
  Component Side w0.254: v1@-144.145,34.465 v1(-143.759,34.465) D263.2@-129.413,34.465 -129.398,34.45 D251.2@117.099,34.45 ; v1@-144.018,88.773 ccw(c-142.936,89.855) -142.936,88.325 14.198,88.325 ccw(c14.198,92.004) 17.877,92.004 17.877,94.828 cw(c21.779,94.828) 21.779,98.73 40.995,98.73 cw(c40.995,96.19) 42.791,97.986 U301.39@44.455,96.322 ; D264.2@-143.815,72.55 cw(c-143.759,72.494) -143.759,72.573 D264.2@-143.759,72.761 ; v1(-143.759,73.914) D264.2@-143.759,72.761 ; D264.2@-143.703,72.573 -143.705,72.581 -143.708,72.588 D264.2@-143.759,72.761 ; U301.39@44.398,96.404 U301.39@46.06,94.743
  Bottom Layer w0.254: v1(-143.759,34.465) -143.836,34.542 cw(c-142.04,36.338) -144.58,36.338 -144.58,72.041 cw(c-142.04,72.041) -143.836,73.837 v1(-143.759,73.914) -143.836,73.991 cw(c-142.04,75.787) -144.58,75.787 -144.58,86.9 cw(c-142.04,86.9) -143.836,88.696 v1(-143.759,88.773)
PF5: D265.2 D267.2 D268.2 D269.2 D270.2 D271.2 D272.2 D273.2 D274.2 D275.2 D276.2 D277.2 D279.2 U301.38 | length 553.7
  Component Side w0.254: D279.2@-166.751,15.4 -166.619,15.4 -123.75,15.4 -90.419,15.4 -71.496,15.4 -52.446,15.4 112.268,15.4 D265.2@112.268,15.415 ; v1(-145.034,88.773) cw(c-144.207,88.773) -144.207,89.6 -144.125,89.6 -144.122,89.6 -143.764,89.6 cw(c-143.759,88.773) -142.956,88.972 ccw(c-142.71,89.033) -142.71,88.779 -141.986,88.779 -138.766,88.779 14.198,88.779 ccw(c14.198,92.004) 17.423,92.004 17.423,94.828 cw(c21.779,94.828) 21.779,99.184 41.684,99.184 cw(c41.684,96.644) 43.48,98.44 U301.38@44.963,96.957 ; U301.38@44.963,96.97 45.358,96.576 ccw(c46.382,96.576) 45.658,95.852 U301.38@46.413,95.096
  Bottom Layer w0.254: v1(-145.034,15.367) v1(-145.034,88.773)
PF6: D280.2 D282.2 D283.2 D284.2 D286.2 D287.2 D288.2 D289.2 U301.37 | length 602
  Component Side w0.254: D289.2@-185.796,-3.65 -166.873,-3.65 -145.895,-3.65 -119.375,-3.65 D284.2@-71.496,-3.65 ; v1(-146.403,88.801) cw(c-144.87,88.801) -146.284,89.394 cw(c-146.05,89.295) -146.225,89.479 cw(c-144.787,87.968) -145.699,89.844 cw(c-144.787,87.968) -145.02,90.041 cw(c-144.787,87.968) -144.787,90.054 -143.755,90.054 cw(c-143.759,88.773) -142.625,89.369 ccw(c-142.4,89.487) -142.4,89.233 -138.767,89.233 -136.686,89.233 ; -136.684,89.233 14.198,89.233 ccw(c14.198,92.004) 16.969,92.004 16.969,94.828 cw(c21.779,94.828) 21.779,99.638 42.375,99.638 cw(c42.375,97.098) 44.171,98.894 U301.37@45.529,97.536 45.854,97.211 ccw(c47.902,97.211) 46.16,96.133 ccw(c47.902,97.211) 46.453,95.763 U301.37@46.767,95.45 ; D284.2@-71.496,-3.635 D283.2@12.324,-3.635 cw(c10.555,-3.635) 12.324,-3.65 D280.2@119.639,-3.65
  Bottom Layer w0.254: v1(-146.403,88.801) -146.232,88.63 cw(c-148.028,86.834) -145.488,86.834 -145.488,16.185 cw(c-145.742,16.184) -145.576,15.992 ccw(c-145.034,15.367) -145.861,15.345 cw(c-146.115,15.339) -145.869,15.274 ccw(c-145.123,15.075) -145.895,15.075 v1(-145.895,-3.655) ; -145.861,15.346 cw(c-145.034,15.367) -145.802,15.674
RAW: CON301.1 F301.1 | length 3.9
  Component Side w0.254: F301.1@23.923,95.631 24.6,94.954 cw(c22.804,93.158) 25.344,93.158 CON301.1@25.344,92.24
RST: CON302.2 R301.2 U301.13 | length 35.6
  Component Side w0.254: U301.13@49.348,88.626 49.527,88.447 cw(c48.893,87.813) 49.789,87.813 49.789,87.012 ccw(c51.057,87.012) U301.13@50.161,86.116 50.26,86.017 ccw(c52.056,87.813) 50.861,85.571 ccw(c51.582,86.292) 50.95,85.492 ccw(c51.582,86.292) 51.582,85.273 51.634,85.273 cw(c51.635,85.019) 51.797,85.215 ccw(c52.324,85.852) 52.851,85.215 cw(c53.013,85.019) 53.014,85.273 56.879,85.273 cw(c56.879,82.914) 58.547,84.582 ccw(c59.945,85.98) 59.945,84.003 v1(65.029,84.003) ; R301.2@71.628,93.487 73.025,93.487 v1(73.025,93.472)
  Bottom Layer w0.254: v1(65.029,84.003) cw(c66.37,84.003) 66.37,85.344 CON302.2@70.358,85.344 70.485,85.344 ccw(c70.485,87.884) 73.025,87.884 v1(73.025,93.472)
scroll_led: D302.2 U301.30 | length 258
  Component Side w0.254: U301.30@50.055,95.45 50.63,96.025 ; 50.63,96.025 ccw(c50.206,96.449) 50.805,96.449 cw(c52.254,96.449) 51.23,97.473 U301.30@51.292,97.536 v1@53.144,99.388
  Bottom Layer w0.254: D302.2@-177.482,99.695 ccw(c-176.281,99.695) -176.281,98.493 -169.286,98.493 ccw(c-169.286,101.487) -166.292,101.487 -166.292,109.082 -166.292,110.378 cw(c-166.038,110.378) -166.291,110.398 cw(c-164.211,110.236) -165.393,111.955 cw(c-164.211,110.236) -164.211,112.322 47.879,112.322 cw(c47.879,109.782) 50.419,109.782 50.419,104.746 ccw(c52.959,104.746) 51.163,102.95 52.601,101.512 cw(c50.805,99.716) 53.345,99.716 v1(53.345,99.568)
VCC: C302.2 C303.2 C304.2 C305.2 C306.2 C309.2 C310.2 Q301.2 R301.1 R303.1 R304.1 U301.2 U301.7 U301.14 U301.24 U301.34 U301.44 U302.5 | length 134.9
  Component Side w0.254: U302.5@29.215,92.109 29.215,93.454 cw(c31.755,93.454) 29.959,95.25 Q301.2@30.839,96.129 35.041,96.129 cw(c35.041,93.589) 35.629,96.06 cw(c35.041,93.589) 35.827,96.004 cw(c35.041,93.589) 36.837,95.385 C304.2@37.861,94.361 ; C310.2@37.866,93.02 37.861,93.025 C304.2@37.861,94.361 ; v1(38.105,96.83) 39.263,95.672 C309.2@39.502,95.672 ; C310.2@38.12,93.02 40.669,90.472 ; 40.661,90.479 ccw(c41.159,90.978) 40.669,90.472 ; U301.2@42.135,90.641 42.043,90.549 cw(c41.262,91.33) 41.262,90.226 cw(c41.262,91.066) 40.669,90.472 ; U301.2@42.136,90.642 cw(c42.972,89.805) 42.972,90.988 43.82,90.988 ccw(c43.82,91.853) 44.432,91.241 U301.2@44.645,91.455 ; C302.2@42.565,85.781 v1(43.82,85.781) cw(c45.967,85.781) 44.448,87.298 ; U301.44@44.292,92.975 43.02,92.975 cw(c43.02,95.027) U301.44@41.569,93.576 41.569,93.605 C309.2@39.502,95.672 ; 44.449,87.299 U301.7@44.963,87.813 45.419,88.268 ccw(c44.985,88.702) 45.598,88.702 cw(c46.01,88.702) 45.719,88.993 U301.7@46.413,89.687 ; C306.2@45.677,101.862 47.314,101.862 cw(c47.314,101.593) v1(47.503,101.783) ; 45.867,101.402 46.653,100.616 cw(c45.27,99.233) U301.34@47.226,99.233 cw(c45.775,97.782) 47.827,97.782 U301.34@47.827,96.51 ; U301.14@49.701,88.98 49.984,88.697 cw(c49.227,87.94) 50.297,87.94 50.297,87.717 ccw(c51.762,87.717) U301.14@50.726,86.682 51.119,86.289 C303.2@53.458,86.289 ; U301.24@52.176,93.328 52.449,93.601 cw(c52.71,93.34) 52.71,93.71 53.644,93.71 ccw(c53.644,95.184) 54.685,94.141 56.073,95.528 cw(c56.817,94.784) C305.2@56.817,95.837 cw(c57.241,95.413) 57.241,96.012 v1(58.293,96.012) ; v1@52.324,85.589 v1(52.324,85.852) ; v1(58.801,99.695) ccw(c59.955,100.849) 59.955,99.217 61.075,99.217 ; 61.075,99.208 cw(c61.075,94.398) 64.475,97.801 cw(c61.075,94.398) 64.477,97.799 69.274,93.002 ccw(c71.07,94.798) 71.07,92.258 72.263,92.258 R303.1@75.746,92.258 ; R304.1@78.095,87.813 R304.1@75.746,87.813 R303.1@75.746,92.258 ; R303.1@78.095,92.258 R303.1@75.746,92.258 ; C304.2@37.861,94.361 ccw(c37.861,95.159) 38.425,94.595 C309.2@39.502,95.672
  Bottom Layer w0.254: v1(38.105,96.83) 38.958,96.83 ccw(c38.958,99.37) 40.754,97.574 44.22,101.039 cw(c46.016,99.243) 46.016,101.783 v1(47.503,101.783) 52.856,96.431 ccw(c54.652,98.227) 53.851,95.816 ccw(c54.652,98.227) 54.652,95.687 56.774,95.687 ; v1@43.91,85.564 cw(c44.127,85.781) v1(43.82,85.781) 52.102,85.781 ccw(c52.102,86.023) 52.273,85.852 v1(52.324,85.852) 52.324,85.903 55.269,88.847 ccw(c53.472,90.643) 56.012,90.643 56.012,93.909 cw(c58.465,93.909) 56.731,95.643 56.774,95.687 ; v1(58.801,99.695) 58.801,97.714 cw(c56.774,97.714) 56.774,95.687
pads on no net: D302. D303. S201. S202. S203. S204. S205. S206. S207. S208. S209. S210. S211. S212. S213. S214. S215. S216. S217. S218. S219. S220. S221. S222. S223. S224. S225. S226. S227. S228. S229. S231. S232. S233. S234. S235. S236. S237. S238. S239. S240. S241. S242. S243. S244. S245. S246. S247. S248. S249. S250. S251. S252. S253. S254. S255. S256. S257. S258. S259. S260. S261. S262. S263. S264. S265. S267. S268. S269. S270. S271. S272. S273. S274. S275. S276. S277. S279. S280. S282. S283. S284. S286. S287. S288. S289. U301.42 U302.1 U302.6
copper on no net: | length 23.4
  Component Side w0.279: 32.136,0.738 cw(c28.418,0.614) 32.135,0.752

## Polygon pours and split planes (outlines as drawn)
GND on Bottom Layer "Bottom Layer-GND" (hatched 45Degree grid 0.508 track 0.203, remove dead copper, pour order 0): 21.087,86.035 22.738,86.035 ccw(c22.738,88.615) 24.563,86.79 24.988,87.215 cw(c26.124,86.079) 26.124,87.686 35.565,87.686 cw(c35.565,84.747) 37.643,86.825 ccw(c37.734,86.915) 37.644,86.824 37.643,86.825 39.022,85.446 ccw(c41.28,87.704) 41.28,84.511 56.012,84.511 cw(c56.012,81.572) 58.09,83.65 ccw(c58.181,83.74) 58.091,83.649 58.09,83.65 58.961,82.779 ccw(c61.219,85.037) 61.219,81.844 65.594,81.844 ccw(c65.594,83.675) 66.889,82.38 ccw(c64.63,84.638) 67.824,84.638 67.824,88.956 ccw(c64.63,88.956) 66.889,91.214 55.731,102.372 cw(c55.641,102.282) 55.731,102.372 ccw(c53.472,100.114) 53.472,103.307 45.344,103.307 ccw(c45.344,100.114) 43.086,102.372 ccw(c43.176,102.282) 43.086,102.372 39.167,98.453 cw(c39.258,98.363) 39.168,98.454 39.167,98.453 cw(c37.089,100.531) 37.089,97.592 21.087,97.592 ccw(c21.087,96.195) 19.69,96.195 19.69,87.432 ccw(c21.087,87.432)
GND on Component Side "Component Side-GND" (hatched 45Degree grid 0.508 track 0.203, remove dead copper, pour order 1): 21.087,86.035 22.738,86.035 ccw(c22.738,88.615) 24.563,86.79 24.988,87.215 cw(c26.124,86.079) 26.124,87.686 35.565,87.686 cw(c35.565,84.747) 37.643,86.825 ccw(c37.734,86.915) 37.644,86.824 37.643,86.825 39.022,85.446 ccw(c41.28,87.704) 41.28,84.511 56.012,84.511 cw(c56.012,81.572) 58.09,83.65 ccw(c58.181,83.74) 58.091,83.649 58.09,83.65 58.961,82.779 ccw(c61.219,85.037) 61.219,81.844 65.594,81.844 ccw(c65.594,83.675) 66.889,82.38 ccw(c64.63,84.638) 67.824,84.638 67.824,88.956 ccw(c64.63,88.956) 66.889,91.214 55.731,102.372 cw(c55.641,102.282) 55.731,102.372 ccw(c53.472,100.114) 53.472,103.307 45.344,103.307 ccw(c45.344,100.114) 43.086,102.372 ccw(c43.176,102.282) 43.086,102.372 39.167,98.453 cw(c39.258,98.363) 39.168,98.454 39.167,98.453 cw(c37.089,100.531) 37.089,97.592 21.087,97.592 ccw(c21.087,96.195) 19.69,96.195 19.69,87.432 ccw(c21.087,87.432)

## Other copper
Component Side:
  region: 1746 vertices and 2 holes, not listed, extent 25.4,-2.516 31.312,3.623
  region: 3595 vertices and 0 holes, not listed, extent -32.103,-3.251 -24.943,3.909
  text "Rev A3" at -4.318,-6.096 h3

## Silkscreen, mask and mechanical layers (free items; w line width, h text height)
Top Overlay:
  lines w0.254: 73.919,90.48 73.919,85.908 89.794,85.908 ; 87.889,85.908 89.794,85.908 ; 89.794,89.083 89.794,85.908 ; 89.794,85.908 89.794,89.972 ; 89.794,89.972 73.919,89.972 73.919,94.544 89.794,94.544 89.794,89.972
  text "+" at -175.339,101.7 h0.75 r270
  text "-" at -177.818,101.071 h0.75
  text "C" at -177.691,97.255 h0.75
  text "A" at -175.151,97.255 h0.75
  text "R_SCROLL" at 83.444,91.75 h0.75
  text "RESET" at 68.834,89.789 h0.75
  text "R_CAPS" at 83.571,87.432 h0.75
  text "+" at 131.841,35.025 h0.75 r270
  text "-" at 129.54,34.296 h0.75
  text "C" at 129.489,30.58 h0.75
  text "A" at 132.029,30.58 h0.75
Top Solder:
  drawing of 3 lines, arcs and shapes, not listed
  text "Rev A3" at -4.318,-6.096 h3
  text "Rev A3" at -4.318,-6.096 h3
  text "Rev A3" at -4.318,-6.096 h3
outline:
  lines w0.203: -52.991,85.4 -52.984,85.393
  lines w0.254: -204.032,-5.896 -204.032,110.685 cw(c-201.032,110.685) -201.032,113.685 ; -204,-5.896 ccw(c-201,-5.896) -201,-8.896 139.299,-8.896 ; -201.032,113.671 139.295,113.671 cw(c139.295,110.671) 142.295,110.671 142.295,-5.915 ; 139.299,-8.915 ccw(c139.299,-5.915) 142.299,-5.915
Mechanical 13:
  lines w0.254: -204.032,-5.896 -204.032,110.685 cw(c-201.032,110.685) -201.032,113.685 ; -204,-5.896 ccw(c-201,-5.896) -201,-8.896 139.299,-8.896 ; -201.032,113.671 139.295,113.671 cw(c139.295,110.671) 142.295,110.671 142.295,-5.915 ; 139.299,-8.915 ccw(c139.299,-5.915) 142.299,-5.915
Mechanical 16:
  lines w0.254: 31.882,97.465 37.089,97.465 ; 37.089,97.465 ccw(c37.089,100.531) 39.258,98.363 41.28,100.386 43.176,102.282 cw(c45.344,100.114) 45.344,103.18 53.472,103.18 cw(c53.472,100.114) 55.641,102.282 66.798,91.124 cw(c64.63,88.956) 67.696,88.956 67.696,84.638 cw(c64.63,84.638) 66.798,82.47 cw(c65.594,83.675) 65.594,81.971 61.219,81.971 cw(c61.219,85.037) 59.051,82.869 58.181,83.74 ccw(c56.012,81.572) 56.012,84.638 41.28,84.638 cw(c41.28,87.704) 39.112,85.536 37.734,86.915 ccw(c35.565,84.747) 35.565,87.813 26.124,87.813 ccw(c26.124,86.079) 24.897,87.305 24.473,86.88 cw(c22.738,88.615) 22.738,86.162 21.087,86.162 cw(c21.087,87.432) 19.817,87.432 19.817,96.195 cw(c21.087,96.195) 21.087,97.465 23.627,97.465 37.089,97.465

## Dimensions
-204.032,110.685 to 142.295,110.671 on top dimensions
139.295,113.671 to 139.299,-8.896 on top dimensions
139.299,-8.896 to 139.295,113.671 on bot dimensions
142.295,110.671 to -204.032,110.685 on bot dimensions